# EAGLE board programmer_jig_v130 (EAGLE 9.7.0)
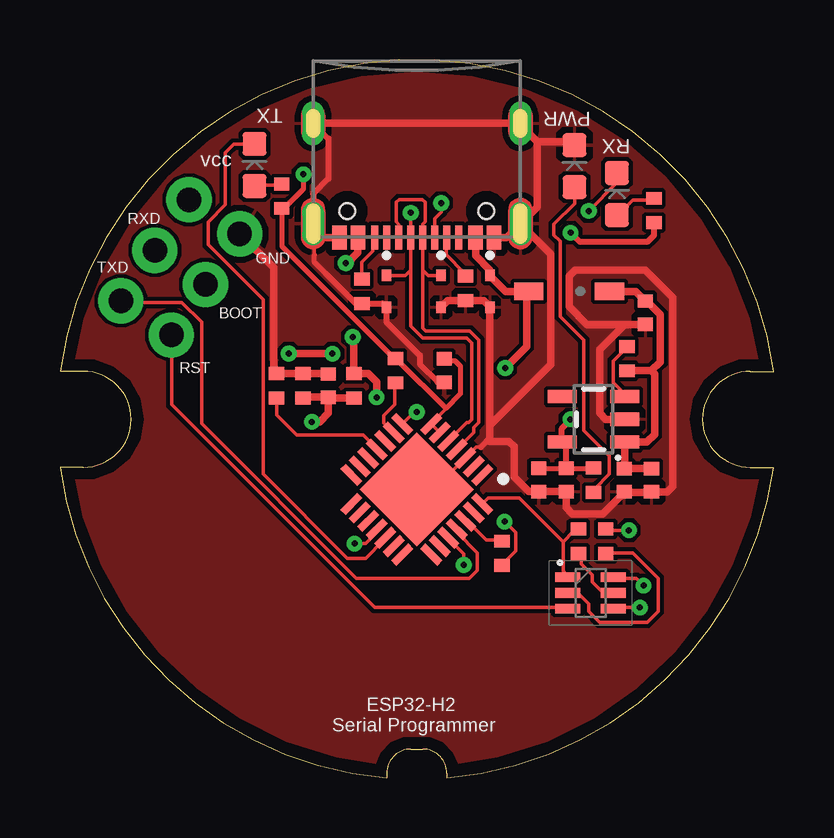
[diagram p0: board, top side]
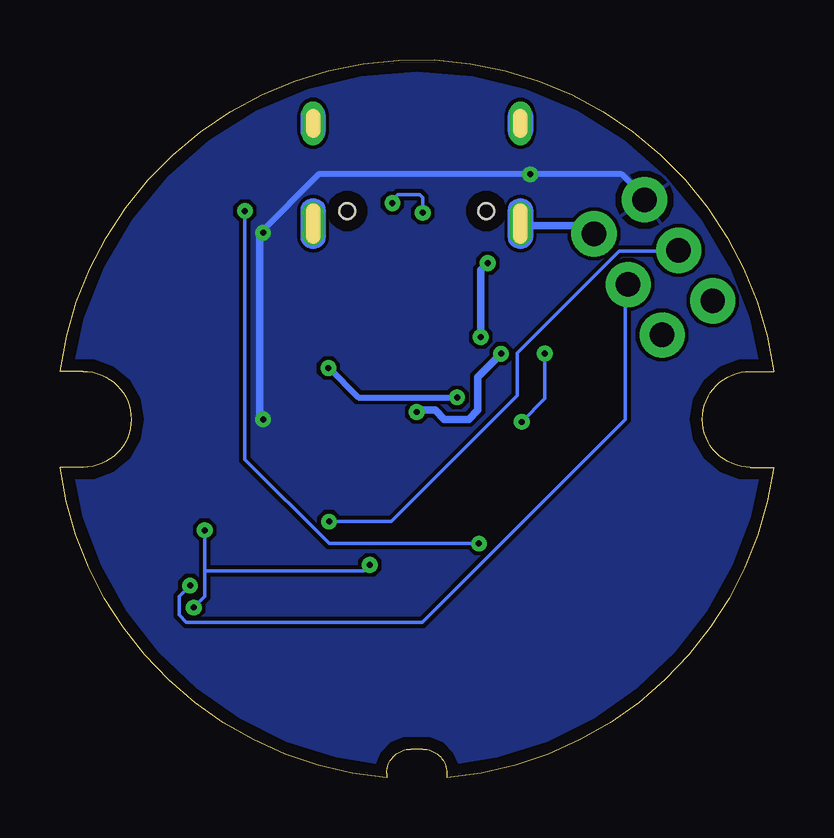
[diagram p1: board, bottom side, seen from below]

Size 29.73 x 29.93 mm. Coordinates in mm from the lower left corner, seen from the top.
Outline: 28.77,16.95 29.73,16.95 arc165 0,16.95 0.97,16.95 arc-180 0.97,12.95 0,12.95 arc78 13.62,0 13.62,0.2 arc-90 14.62,1.2 15.12,1.2 arc-90 16.12,0.2 16.12,0 arc78 29.73,12.95 28.77,12.95 arc-180 28.77,16.95
Copper layers (1*16): Top / Bottom
Stack-up Default Layer Stack: Top User Defined 0.035mm / Dielectric-1 User Defined 1.5mm / Bottom User Defined 0.035mm
Design rules: minimum drill size all 0.25mm, minimum drill size 0.35mm, minimum copper width 6mil, keepout clearance 0mil, drill distance 6mil, via restrict clearance 0mil, dimension clearance all to all 8mil, dimension clearance 40mil, restrict clearance 0mil, copper clearance wire_polygon to wire_polygon 6mil, copper clearance wire_polygon to pad_smd 6mil, copper clearance wire_polygon to via 6mil, copper clearance pad_smd to pad_smd 6mil, copper clearance pad_smd to via 6mil, copper clearance via to via 6mil, copper clearance smd to pad (same net) 6mil, copper clearance smd to via (same net) 6mil, copper clearance smd to smd (same net) 6mil

## Footprints (pad centres in the part's own frame; a part is rotated, then mirrored left to right if it is on the bottom)
SOT23-5 = smd 0.55 x 1.2: 1 -0.95,-1.3; 2 0,-1.3; 3 0.95,-1.3; 4 0.95,1.3; 5 -0.95,1.3
CAPC1005X60 = smd 0.56 x 0.629: 1 -0.485,0; 2 0.485,0
SOD3715X145N = smd 1.21 x 0.73: 1 -1.68,0; 2 1.68,0
D5V0L1B2LP4-7B = smd 0.48 x 0.4: 1 -0.66,0; 2 0.66,0
QFN50P500X500X80-29N = smd 1 x 0.3: 1 -2.35,1.5; 2 -2.35,1; 3 -2.35,0.5; 4 -2.35,0; 5 -2.35,-0.5; 6 -2.35,-1; 7 -2.35,-1.5; 15 2.35,-1.5; 16 2.35,-1; 17 2.35,-0.5; 18 2.35,0; 19 2.35,0.5; 20 2.35,1; 21 2.35,1.5 | smd 0.3 x 1: 8 -1.5,-2.35; 9 -1,-2.35; 10 -0.5,-2.35; 11 0,-2.35; 12 0.5,-2.35; 13 1,-2.35; 14 1.5,-2.35; 22 1.5,2.35; 23 1,2.35; 24 0.5,2.35; 25 0,2.35; 26 -0.5,2.35; 27 -1,2.35; 28 -1.5,2.35 | smd 3.35 x 3.35: 29 0,0
SOT65P210X110-6N = smd 1.05 x 0.4: 1 -0.95,0.65; 2 -0.95,0; 3 -0.95,-0.65; 4 0.95,-0.65; 5 0.95,0; 6 0.95,0.65
USB-C-16P-2LAYER-PADS = smd 0.3 x 1: A5 -1.25,-0.34; A6 -0.25,-0.34; A7 0.25,-0.34; A8 1.25,-0.34; B5 1.75,-0.34; B6 0.75,-0.34; B7 -0.75,-0.34; B8 -1.75,-0.34 | smd 0.6 x 1: GND -3.225,-0.34; GND2 3.225,-0.34; VBUS1 -2.45,-0.34; VBUS2 2.45,-0.34 | drill 0.4 pad 0.6 long: SHLD1 -4.318,-0.915; SHLD2 4.318,-0.915; SHLD3 -4.318,-5.095; SHLD4 4.318,-5.095 | hole 0.65: -2.89,-1.445; 2.89,-1.445
2X3_PROG_POGOS = drill 1.016 pad 1.88: 1 0,0; 2 0,2.54; 3 2.54,0; 4 2.54,2.54; 5 5.08,0; 6 5.08,2.54
RESC1005X40 = smd 0.535 x 0.644: 1 -0.507,0; 2 0.507,0
LED-0603 = smd 1 x 1: A -0.877,0; C 0.877,0

## Placement (x,y rotation side)
AP2112_3.3V  3.3V  [SOT23-5]  22.23,14.95 90 top
C1  10uF  [CAPC1005X60]  24.39,19.39 270 top
C2  10uF  [CAPC1005X60]  16.01,16.98 270 top
C3  1uF  [CAPC1005X60]  11.18,16.35 90 top
C4  10uF  [CAPC1005X60]  23.5,12.41 270 top
C5  0.1uF  [CAPC1005X60]  24.65,12.41 270 top
C6  0.1uF  [CAPC1005X60]  21.09,12.42 270 top
C7  10uF  [CAPC1005X60]  19.95,12.42 270 top
D1  1N5819HW-7-F  [SOD3715X145N]  21.22,20.28 180 top
D2  D5V0L1B2LP4-7B  [D5V0L1B2LP4-7B]  17.91,20.28 270 top
D3  D5V0L1B2LP4-7B  [D5V0L1B2LP4-7B]  13.6,20.28 270 top
D4  D5V0L1B2LP4-7B  [D5V0L1B2LP4-7B]  15.88,20.28 270 top
IC1  CP2102N-A02-GQFN28  [QFN50P500X500X80-29N]  14.87,12.03 225 top
IC2  BC847BDW1T1G (DUAL NPN)  [SOT65P210X110-6N]  22.11,7.71 0 top
J1  [USB-C-16P-2LAYER-PADS]  14.87,22.19 180 top
J2  2X3_2.5_prog  [2X3_PROG_POGOS]  5.38,24.1 236 top
R1  5.1K  [RESC1005X40]  12.58,20.28 90 top
R2  5.1K  [RESC1005X40]  16.9,20.41 90 top
R3  22.1K  [RESC1005X40]  12.24,16.34 270 top
R4  47.5K  [RESC1005X40]  10.13,16.34 270 top
R5  1K  [RESC1005X40]  13.98,16.98 90 top
R6  10K  [RESC1005X40]  9.02,16.34 90 top
R7  100  [RESC1005X40]  9.24,24.25 270 top
R8  100  [RESC1005X40]  24.74,23.65 270 top
R9  470  [RESC1005X40]  18.42,9.36 270 top
R10  10K  [RESC1005X40]  23.63,17.48 90 top
R11  5.1K  [RESC1005X40]  22.23,12.41 270 top
R12  10K  [RESC1005X40]  22.74,9.87 90 top
R13  10K  [RESC1005X40]  21.6,9.87 270 top
RX_LED  GREEN  [LED-0603]  23.2,24.34 90 top
TX_LED  GREEN  [LED-0603]  8.11,25.55 90 top
USB_POWER_LED  GREEN  [LED-0603]  21.44,25.5 90 top

## Library data of the parts
AP2112_3.3V = Help-by-jennyfer-button-design-lib; PROD_ID: VREG-12457
C1-C7 = Help-by-jennyfer-button-design-lib; CATEGORY: Capacitor; PACKAGE_SIZE: 0402; PACKAGE_TYPE: SMD; SUBCATEGORY: Ceramic Capacitors; TYPE: MLCC
D1 = Help-by-jennyfer-button-design-lib; MANUFACTURER: Diodes Inc.; PARTREV: 18-2; STANDARD: IPC-7351B
D2-D4 = Help-by-jennyfer-button-design-lib; AVAILABILITY: In Stock; CHECK_PRICES: https://www.snapeda.com/parts/LESD5D5.0CT1G/Leshan+Radio/view-part/?ref=eda; DESCRIPTION: Transient Voltage Suppressors for ESD Protection; MF: Leshan Radio Co.; MP: LESD5D5.0CT1G; PACKAGE: None; PRICE: None; SNAPEDA_LINK: https://www.snapeda.com/parts/LESD5D5.0CT1G/Leshan+Radio/view-part/?ref=snap
IC1 = Help-by-jennyfer-button-design-lib; DESCRIPTION: SILICON LABS - CP2102N-A02-GQFN28 - USB TO UART BRIDGE, -40 TO 85DEG C; HEIGHT: 0.8mm; MANUFACTURER_NAME: Silicon Labs; MANUFACTURER_PART_NUMBER: CP2102N-A02-GQFN28; MOUSER_PART_NUMBER: 634-CP2102NA02GQFN28; MOUSER_PRICE-STOCK: https://www.mouser.co.uk/ProductDetail/Silicon-Labs/CP2102N-A02-GQFN28?qs=u16ybLDytRaSBkSkyjYFiA%3D%3D
IC2 = Help-by-jennyfer-button-design-lib; DESCRIPTION: BC847BDW1T1G, Dual NPN Bipolar Transistor, 0.1 A 45 V HFE:200 100 MHz Small Signal, 6-Pin SC-88; HEIGHT: 1.1mm; MANUFACTURER_NAME: onsemi; MANUFACTURER_PART_NUMBER: BC847BDW1T1G; MOUSER_PART_NUMBER: 863-BC847BDW1T1G; MOUSER_PRICE-STOCK: https://www.mouser.co.uk/ProductDetail/onsemi/BC847BDW1T1G?qs=vNc2DXHODiJIIkxW3oEo4A%3D%3D
J1 = Help-by-jennyfer-button-design-lib; PROD_ID: CONN-14122
J2 = Help-by-jennyfer-button-design-lib
R1-R13 = Help-by-jennyfer-button-design-lib; CATEGORY: Resistor; SUB-CATEGORY: Fixed
RX_LED TX_LED USB_POWER_LED = Help-by-jennyfer-button-design-lib; PROD_ID: DIO-00821

## Nets
CHIP_PU/RST/EN: IC2.3 J2.6
DTR: IC1.28 IC2.1 R13.1
GND: AP2112_3.3V.2 C1.2 C2.2 C3.2 C4.2 C5.2 C6.2 C7.2 D2.2 D3.2 D4.2 IC1.3 IC1.29 J1.GND J1.GND2 J1.SHLD1 J1.SHLD2 J1.SHLD3 J1.SHLD4 J2.2 R1.1 R2.1 R4.1 R6.2 USB_POWER_LED.C
GPIO_9/BOOT: IC2.6 J2.4
N$2: J1.B5 R1.2
N$3: R7.1 TX_LED.A
N$4: J1.A5 R2.2
N$5: R8.1 RX_LED.A
N$10: R11.2 USB_POWER_LED.A
N$11: IC2.2 R12.1
N$12: IC2.5 R13.2
RSTB: IC1.9 R5.1
RTS: IC1.24 IC2.4 R12.2
RXT: IC1.18 RX_LED.C
SUSPENDDB: IC1.11 R6.1
TXD: IC1.26 R9.1
TXT: IC1.19 TX_LED.C
UART_RXD: J2.3 R9.2
UART_TXD: IC1.25 J2.5
USB_D_N: D3.1 IC1.5 J1.A7 J1.B7
USB_D_P: D4.1 IC1.4 J1.A6 J1.B6
VBUS: C3.1 IC1.8 R3.2 R4.2
VBUSA: D1.2 D2.1 J1.VBUS1 J1.VBUS2 R3.1
VCC_3V3: AP2112_3.3V.5 C2.1 C6.1 C7.1 IC1.6 IC1.7 J2.1 R5.2 R7.2 R8.2 R11.1
VCC_5V: AP2112_3.3V.1 C1.1 C4.1 C5.1 D1.1 R10.1
VREG_EN: AP2112_3.3V.3 R10.2

## Tracks (layer width: path | path; a pad name or v marks a point on that pad's centre or on a via)
CHIP_PU/RST/EN
  Top 0.152: IC2.3 21.11,7.1 13.11,7.1 4.66,15.56 4.66,18.45 J2.6
DTR
  Top 0.152: 20.96,9.84 21.39,10.27 R13.1 | 20.96,9.84 20.96,8.62 21.11,8.47 IC2.1 | IC1.28 17.83,11.67 19.13,11.67 20.96,9.84
GND
  Top 0.152: 10.6,22.95 10.6,23.02 J1.SHLD2 | 10.6,22.95 10.6,21.81 | 21.42,26.53 USB_POWER_LED.C | D2.2 17.91,19.65 | 10.6,27.29 J1.SHLD4 | 19.13,27.29 J1.SHLD3 | 19.22,23.11 J1.SHLD1 | 11.02,22.53 10.6,22.95 | IC1.29 15.57,12.03 IC1.3 17.34,13.8 17.54,13.8 17.55,13.79
  Top 0.203: 11.06,21.04 10.6,21.5 10.6,21.81
  Top 0.254: 17.91,14.16 17.55,13.79 | C2.2 15.73,16.49 14.99,17.23 14.99,17.61 13.6,19.01 D3.2 13.44,19.77 R1.1 12.33,19.77 11.06,21.04 | J1.SHLD4 11.18,26.65 11.18,24.98 10.55,24.35 J1.SHLD2
  Top 0.305: 19.9,26.53 21.42,26.53 | 19.9,26.53 19.29,27.14 J1.SHLD3 | 19.9,26.53 19.9,23.79 19.22,23.11 | 17.91,14.69 17.91,14.16 17.91,14.03 18.7,14.03 18.93,13.8 18.93,12.53 19.53,11.93 C7.2 C6.2 21.09,11.26 21.34,11.01 22.61,11.01 23.5,11.9 | 19.13,27.29 10.6,27.29 | J1.GND 18.61,22.53 J1.SHLD1 20.45,21.84 20.45,17.23 17.91,14.69 | J1.GND2 11.02,22.53 | 23.5,11.9 C4.2 | AP2112_3.3V.2 22.74,14.95 22.49,15.2 22.49,17.87 23.53,18.91 C1.2 21.96,18.91 21.22,19.65 21.22,20.92 21.47,21.17 24.39,21.17 25.53,20.03 25.53,12.15 25.3,11.92 C5.2 24.62,11.9 23.5,11.9 | 17.91,19.65 17.66,19.9 R2.1 16.16,19.9 D4.2 | 17.91,14.69 D2.2 | R6.2 9.15,16.85 | 9.15,16.85 R4.1 11.17,16.85 C3.2 | J2.2 8.9,21.26 8.9,17.11 9.15,16.85
  Bottom 0.152: 10.45,23.02 J1.SHLD2 | 7.55,22.72 J2.2
  Bottom 0.305: 10.45,23.02 7.86,23.02 7.55,22.72
  pour Top (rank 3): -2.66,31.33 31.12,31.33 31.12,-2.45 -2.66,-2.45
GPIO_9/BOOT  (via drill 0.25)
  Top 0.152: v24.32,8.01 24.01,8.32 23.1,8.32 IC2.6
  Bottom 0.152: v24.32,8.01 24.77,7.56 24.77,6.79 24.47,6.49 14.64,6.49 6.18,14.95 6.18,20.43 J2.4
N$2
  Top 0.152: R1.2 12.58,21.5 13.04,21.96 13.04,22.42 J1.B5
N$3
  Top 0.152: R7.1 9.23,24.7 8.16,24.7 TX_LED.A
N$4
  Top 0.152: R2.2 16.85,21.04 16.09,21.81 16.09,22.42 J1.A5
N$5
  Top 0.152: R8.1 24.62,24.09 23.86,24.09 23.25,23.48 RX_LED.A
N$10
  Top 0.152: R11.2 22.28,12.05 22.89,12.66 22.89,13.42 21.83,14.49 21.83,18.24 20.84,19.23 20.84,22.38 20.58,22.63 20.58,23.08 21.44,23.93 USB_POWER_LED.A
N$11
  Top 0.152: IC2.2 21.57,7.71 22.03,7.25 22.03,6.95 22.49,6.49 24.47,6.49 24.92,6.95 24.92,8.32 23.86,9.38 22.75,9.38 R12.1
N$12
  Top 0.152: IC2.5 22.64,7.71 22.18,8.17 22.18,8.47 21.72,8.93 21.72,9.26 R13.2
RSTB
  Top 0.152: R5.1 13.95,16.47 13.95,15.56 13.49,15.1 13.49,14.8 13.89,14.4 IC1.9
RTS  (via drill 0.25)
  Top 0.152: v23.71,10.32 22.79,10.32 R12.2 | v24.16,7.1 23.1,7.1 IC2.4 | v16.82,8.88 16.82,9.33 16.24,9.92 IC1.24
  Bottom 0.152: 23.71,8.62 23.71,7.56 v24.16,7.1 | 23.71,8.62 v23.71,10.32 | 23.71,8.62 17.08,8.62 v16.82,8.88
RXT  (via drill 0.25)
  Top 0.152: v12.28,9.77 12.73,9.77 13.19,10.22 IC1.18 | RX_LED.C 23.2,24.81 v22.03,23.63
  Bottom 0.152: v12.28,9.77 18.52,9.77 22.03,13.27 v22.03,23.63
SUSPENDDB
  Top 0.152: R6.1 9.02,15.13 9.86,14.29 12.63,14.29 13.2,13.71 IC1.11
TXD
  Top 0.152: R9.1 18.37,9.92 17.76,9.92 17,10.68 IC1.26
TXT
  Top 0.152: TX_LED.C 7.25,26.43 6.89,26.07 6.89,23.89 6.18,23.18 6.18,22.23 8.47,19.94 8.47,12.66 11.97,9.16 12.73,9.16 13.49,9.92 IC1.19
UART_RXD  (via drill 0.25)
  Top 0.152: v18.52,10.68 18.98,10.22 18.98,9.46 18.52,9 R9.2
  Bottom 0.152: J2.3 3.99,21.96 6.43,21.96 10.68,17.71 10.68,15.93 15.93,10.68 v18.52,10.68
UART_TXD
  Top 0.152: IC1.25 16.54,10.22 17.38,9.39 17.38,8.65 17.05,8.32 12.35,8.32 5.9,14.77 5.9,19.01 5.08,19.82 2.6,19.82 J2.5
USB_D_N  (via drill 0.25)
  Top 0.152: 14.62,21.17 J1.A7 v14.61,23.55 v14.62,23.56 | 14.62,21.17 14.62,18.83 15.12,18.33 16.95,18.33 17.15,18.12 17.15,14.95 17.03,14.82 16.95,14.82 IC1.5 | D3.1 14.39,20.94 14.62,21.17 | v15.88,23.96 15.88,23.58 15.62,23.32 J1.B7
  Bottom 0.152: v14.62,23.56 14.62,24.19 14.74,24.32 15.65,24.32 15.88,24.09 v15.88,23.96
USB_D_P
  Top 0.152: 15.12,21.17 J1.A6 15.12,23.08 15.22,23.18 15.22,23.99 15.1,24.12 14.13,24.12 14.01,23.99 14.01,23.18 14.12,23.07 J1.B6 | 15.12,21.17 15.12,18.76 15.25,18.63 17.08,18.63 17.37,18.34 | 17.37,18.34 | 17.37,18.34 17.46,18.25 17.46,14.82 17.37,14.73 | 17.37,14.73 | 17.37,14.73 17.24,14.6 17.24,14.4 IC1.4 | D4.1 15.35,20.94 15.12,21.17
VBUS  (via drill 0.25)
  Top 0.152: v11.35,17.69 v11.35,17.68 | IC1.8 14.77,15.25 v14.87,15.25
  Top 0.305: v9.53,17.69 v11.35,17.69 | v10.5,14.84 10.83,14.84 11.18,15.2 C3.1 | R4.2 10.16,15.87 C3.1 | R3.2 11.21,15.84 C3.1
  Bottom 0.152: v10.5,14.84 9.53,15.81 v9.53,17.69
  Bottom 0.305: v11.35,17.68 12.33,16.71 12.33,15.33 12.71,14.95 13.72,14.95 14.1,15.33 14.79,15.33 v14.87,15.25
VBUSA  (via drill 0.25)
  Top 0.152: 17.91,20.89 D2.1 | 19.44,20.28 D1.2 | 11.95,21.42 v11.91,21.46
  Top 0.305: J1.VBUS2 12.42,21.9 11.95,21.42 | J1.VBUS1 17.32,21.77 17.91,21.17 17.91,20.89 | D2.1 18.57,20.28 19.44,20.28 | D1.2 19.44,20.18 19.44,17.97 v18.55,17.08 | v12.2,18.38 12.24,18.33 R3.1 12.83,16.85 13.19,16.5 v13.19,15.86
  Bottom 0.152: v18.55,17.08 18.52,17.08
  Bottom 0.254: v13.19,15.86 17.3,15.86 18.52,17.08
  Bottom 0.305: v11.91,21.46 12.2,21.17 v12.2,18.38
VCC_3V3  (via drill 0.25)
  Top 0.152: 16.09,17.39 C2.1 | 14.1,17.39 R5.2 13.95,17.49 | 9.25,23.73 R7.2 9.38,23.79 | IC1.6 IC1.7 15.47,14.79 16.09,15.4
  Top 0.203: 16.09,17.39 16.47,17.39 16.7,17.16 16.7,16.01 16.09,15.4 14.1,17.39 | 9.38,23.79 10.14,24.55 v10.14,25.16 | C7.1 C6.1 22.22,12.9 R11.1 | 13.95,17.49 13.92,17.49 9.25,22.15 9.25,23.73
  Top 0.254: R8.2 24.74,22.61 24.47,22.34 21.66,22.34 v21.27,22.73 | C6.1 21.09,13.84 AP2112_3.3V.5 20.91,14.02 20.91,14.57 21.27,14.92 v21.27,14.95
  Bottom 0.152: 5.42,24.24 J2.1 | 21.42,22.69 21.42,22.57 v21.27,22.72 v21.27,22.73
  Bottom 0.254: 21.42,22.69 18.96,25.16 v10.14,25.16 6.33,25.16 5.42,24.24
  Bottom 0.305: 21.42,22.57 21.42,15.1 v21.27,14.95
  pour Bottom (rank 3): -2.02,30.82 30.49,30.82 30.49,-1.69 -2.02,-1.69
VCC_5V
  Top 0.305: D1.1 23.99,20.28 C1.1 24.45,19.88 25.01,19.31 25.01,17.34 24.64,16.97 | R10.1 24.64,16.97 | 24.64,16.97 24.77,16.84 24.77,14.31 24.46,14 AP2112_3.3V.1 23.53,12.92 C4.1 C5.1
VREG_EN
  Top 0.152: R10.2 23.5,17.84 23.05,17.39 23.05,16.47 23.5,16.01 AP2112_3.3V.3

## Text on the board
SilkscreenTop: TX | PWR | RX | vcc | RXD | TXD | GND | BOOT | RST | ESP32-H2 / Serial Programmer
Document: "HELP" by